# Altium PCB zigo_pcb2.PcbDoc
Units mm, origin at the board's own origin, x right, y up, seen from the top; angles counter-clockwise.
Board outline 87.88 x 73.23 mm, 2 copper layers (Top Layer, Bottom Layer); 42 components, 31 nets, 175 pads, 6 vias.
Unrouted connection lines stored in the file: 3.
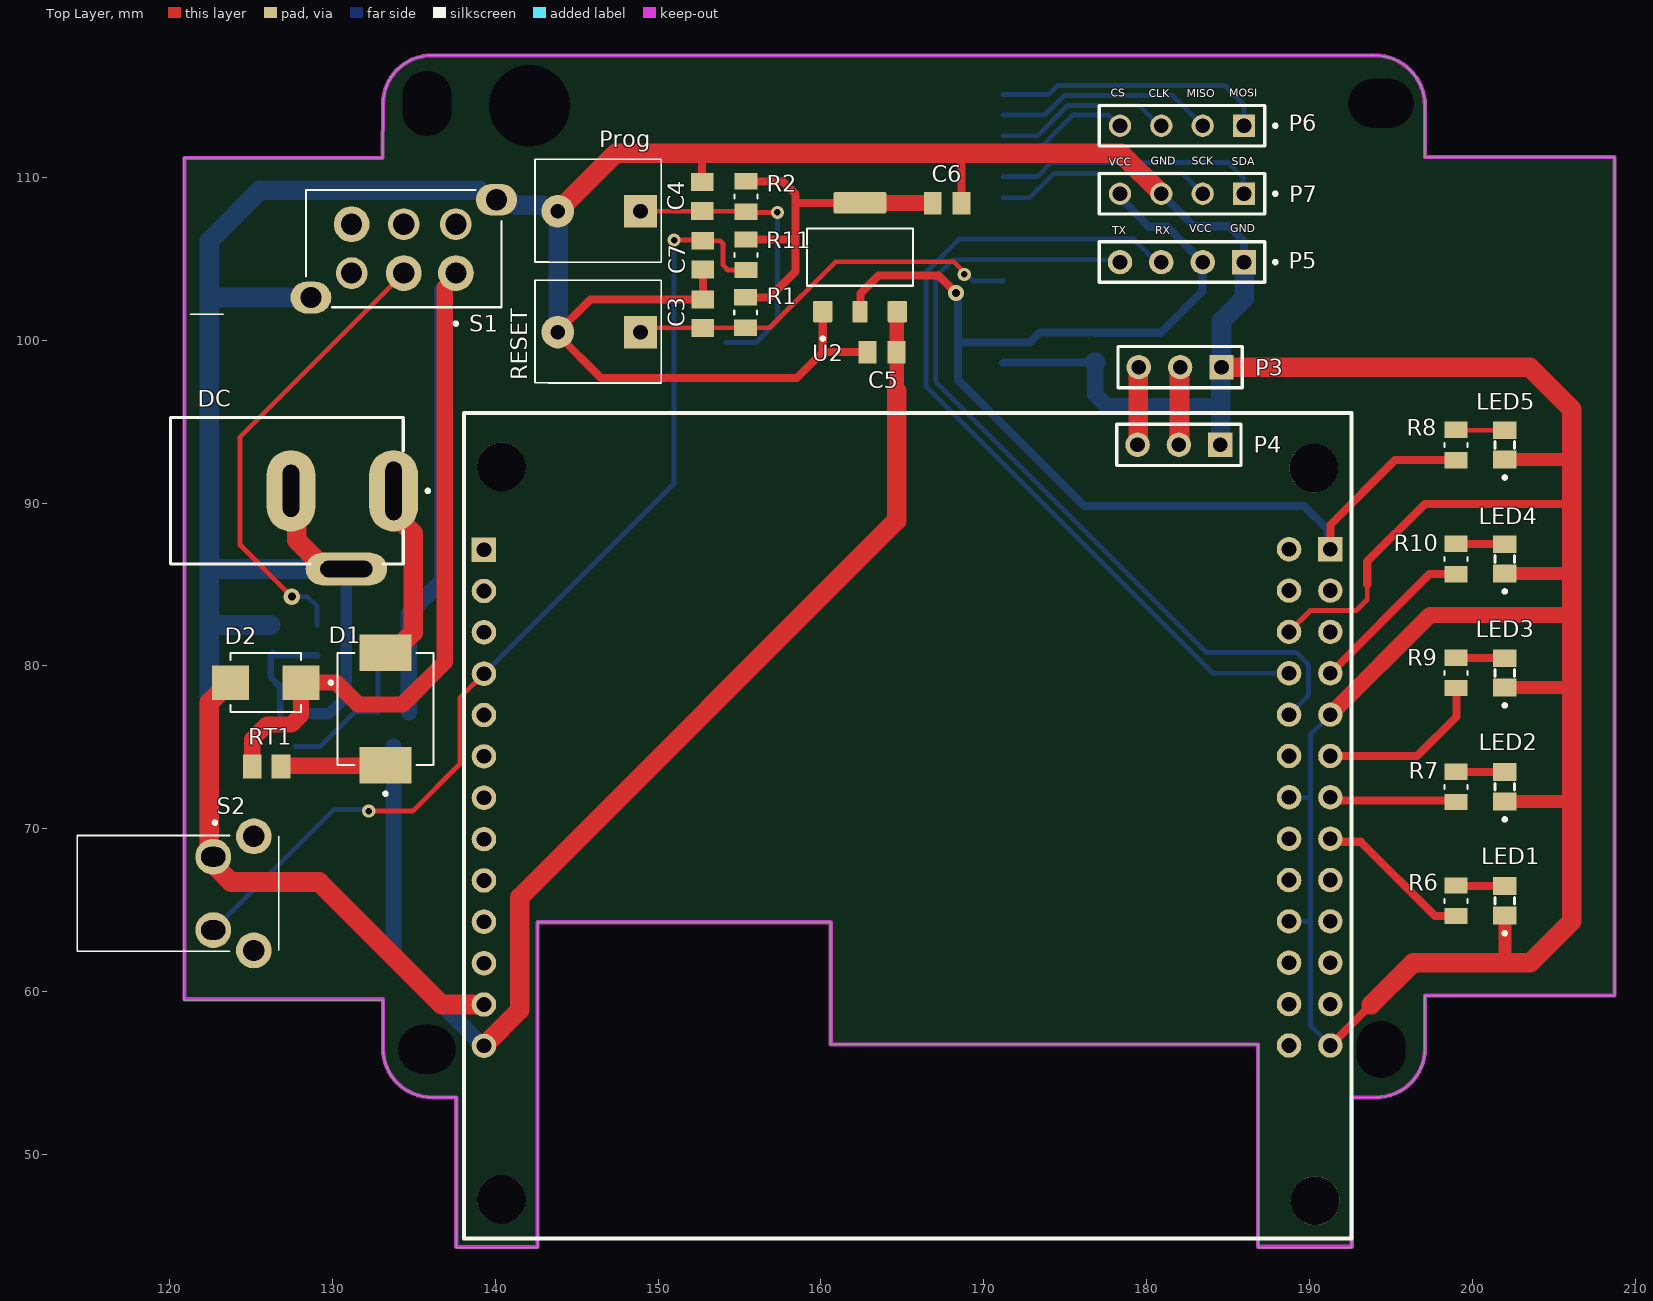
[diagram p0: Top Layer view]
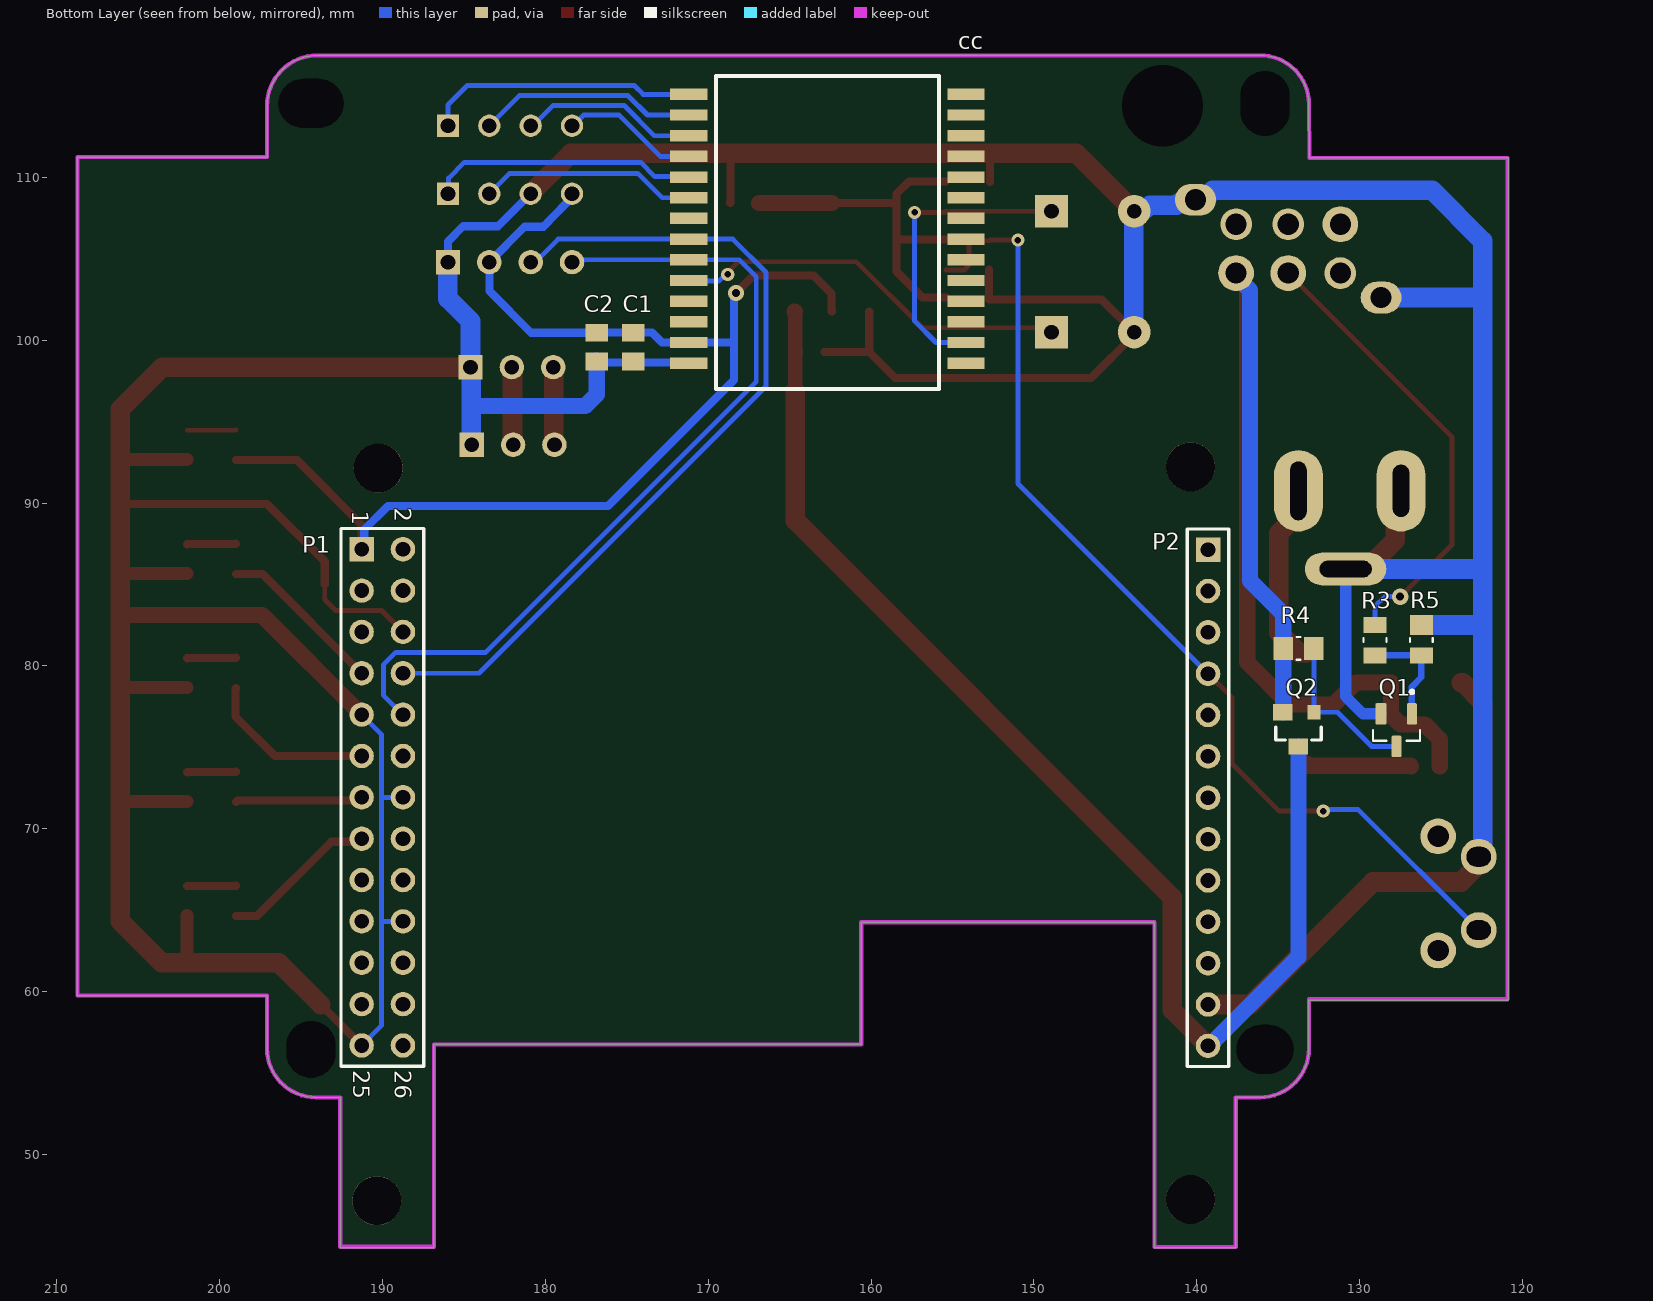
[diagram p1: Bottom Layer view, seen from below]

## Layer stack, top to bottom
Top Solder: solder mask 0.0102, Solder Resist, Dk 3.5
Top Layer: signal copper 0.0356
Dielectric 1: dielectric 0.32, FR-4, Dk 4.8
Bottom Layer: signal copper 0.0356
Bottom Solder: solder mask 0.0102, Solder Resist, Dk 3.5

## Board outline
133.1,56.5 ccw(c136.1,56.5) 136.1,53.5 137.6,53.5 137.6,44.275 142.6,44.275 142.6,64.25 160.6,64.25 160.6,56.75 186.85,56.75 186.85,44.275 192.6,44.275 192.6,53.5 194.1,53.482 194.1,53.5 ccw(c194.1,56.5) 197.1,56.5 197.1,59.75 208.75,59.75 208.75,111.25 197.1,111.25 197.1,114.396 ccw(c193.996,114.396) 193.996,117.5 136.1,117.5 ccw(c136.1,114.5) 133.1,114.5 133.075,111.2 120.875,111.2 120.875,59.45 133.1,59.45
cut-out: 119.6,170.327 119.6,191.9 141.863,191.9 141.863,170.327

## Design rules (kind name [scope] priority, off if disabled: settings)
Clearance Type-C [HasFootprint('VALCON_CSP-USC16-TR')] p1: gap=0.127 ignorepadtopadclearanceinfootprint=FALSE
Clearance [All] p2: gap=0.3 ignorepadtopadclearanceinfootprint=FALSE
PolygonConnect [All] p1: connectstyle=Relief reliefconductorwidth=0.254 reliefentries=4 polygonreliefangle="90 Angle" airgapwidth=0.254
RoutingVias [All] p1: holewidth=0.711 width=1.27 viastyle="Through Hole" minholewidth=0.711 minwidth=1.27 maxholewidth=0.711 maxwidth=1.27
SolderMaskExpansion [All] p1: expansion=0.102 istentingtop=FALSE
Width [All] p1: maxlimit=2 minlimit=0.3 preferedwidth=0.5 minimp=50.000000 maximp=50.000000 favimp=50.000000
Width Width_1 [All] p2: maxlimit=1 minlimit=0.254 preferedwidth=0.5 minimp=50.000000 maximp=50.000000 favimp=50.000000
30 further rules are at their usual default settings.

## Components (designator, comment, footprint, x,y, rotation, side; value= is the part's Value field where it differs from the comment)
C1 "10 uf" CAPC2012X90N 174.6,99.575 r90 bottom
C2 "100 nf" CAPC2012X90N 176.85,99.575 r90 bottom
C3 "100 nf" CAPC2012X90N 152.75,101.625 r270 top
C4 "100 nf" CAPC2012X90N 152.7,108.825 r270 top
C5 "10 uf" CAPC2012X90N 163.75,99.275 r0 top
C6 "10 uf" CAPC2012X90N 167.75,108.425 r180 top
C7 "100 nf" CAPC2012X90N 152.75,105.225 r90 top
cc "RF-BM-2652P2" "PCBCOMPONENT_1 - DUPLICATE" 162.675,112.05 r180 bottom
D1 "SS34" DIOM7959X265N 133.25,77.35 r90 top
D2 "SMBJ5.0A" DIOM4336X265N 125.9,78.975 r180 top
DC "DCJ200-10-A-XX-K_REVA" GCT_DCJ200-10-A-XX-K_REVA 127.2,90.75 r270 top locked
LED1 "597-3305-607F" LEDC2012X70N 202,65.575 r90 top
LED2 "597-3305-607F" LEDC2012X70N 202,72.57 r90 top
LED3 "597-3305-607F" LEDC2012X70N 202,79.57 r90 top
LED4 "597-3305-607F" LEDC2012X70N 202,86.57 r90 top
LED5 "597-3305-607F" LEDC2012X70N 202,93.57 r90 top
P1 "Header 13X2" HDR2X13 191.29,87.165 r270 bottom locked
P2 "Header 13" HDR1X13 139.3,87.14 r270 bottom locked
P3 "Orangepi Serial" HDR1X3 184.6,98.35 r180 top
P4 "Header 3" HDR1X3 184.525,93.575 r180 top locked
P5 "HTSW-104-07-G-S" SAMTEC_HTSW-104-07-G-S#1 182.175,104.8 r0 top
P6 "HTSW-104-07-G-S" SAMTEC_HTSW-104-07-G-S#2 182.175,113.175 r0 top
P7 "HTSW-104-07-G-S" SAMTEC_HTSW-104-07-G-S#2 182.175,109 r0 top
Prog "Push Button" "PUSH BUTTON" 146.375,107.925 r90 top
Q1 "BC817-40" SOT95P240X120-3N 127.725,76.05 r270 bottom
Q2 "AO3401A" SOT23-3 133.75,76.15 r90 bottom
R1 "1K" RESC2012X65N#1 155.375,101.7 r90 top
R2 "1K" RESC2012X65N#1 155.4,108.825 r90 top
R3 "1K" RESC2012X65N#1 129.05,81.575 r90 bottom
R4 "1K" RESC2012X65N#2 133.75,81.075 r180 bottom
R5 "1K" RESC2012X65N#3 126.2,81.575 r90 bottom
R6 "1K" RESC2012X65N#1 199,65.57 r90 top
R7 "1K" RESC2012X65N#1 199,72.57 r90 top
R8 "1K" RESC2012X65N#1 199,93.57 r90 top
R9 "1K" RESC2012X65N#1 199,79.57 r90 top
R10 "1K" RESC2012X65N#1 199,86.57 r90 top
R11 "10k" RESC2012X65N#1 155.4,105.25 r90 top
RESET "Push Button" "PUSH BUTTON" 146.375,100.5 r90 top
RT1 "PRG21BC0R6MM1RA" THRMC2012X110N 125.95,73.825 r180 top
S1 "SPPJ222200" SW_SPPJ222200 134.375,105.625 r180 top
S2 "FSMRA4JH04" FSMRA4JH04 123.92,66.025 r270 top locked
U2 "AMS1117-3.3" SOT229P700X180-4N 162.4,105.1 r90 top

## Footprints (in the part's own frame and the unit in brackets; to place one, negate y for a bottom-side part, rotate by r counter-clockwise, add the part's x,y. Pads: shape width x height; smd on the part's side, far side on the other; paste and mask are expansions set on the pad)
CAPC2012X90N [mm]
  rect 1.1x1.38 smd: 1(-0.885,0) 2(0.885,0)
  body extent -1,-0.63 1,0.63, height 0.9
DIOM4336X265N [mm]
  rect 2.28x2.12 smd: A(2.165,0) C(-2.165,0)
  silkscreen extent -4.1,-1.81 2.16,1.81, body extent -2.67,-1.81 2.67,1.81, height 2.65
DIOM7959X265N [mm]
  rect 2.25x3.18 smd: A(3.455,0) C(-3.455,0)
  silkscreen extent -5.3,-2.95 3.44,2.95, body extent -3.98,-2.95 3.98,2.95, height 2.65
FSMRA4JH04 [mm]
  round 2.2 hole 1.2 slot 1.5 at 90 deg: 1(-2.25,-1.245) 2(2.25,-1.245)
  round 2.2 hole 1.3: 3(3.505,1.245) 4(-3.505,1.245)
  silkscreen extent -4.45,-9.6 3.56,2.76, body extent -4.21,-7 4.21,2.66, height 7.01
GCT_DCJ200-10-A-XX-K_REVA [mm]
  oval 5x3 hole 1 slot 3.6 at 0 deg: 1(0,6.55)
  oval 5x3 hole 1 slot 3.2 at 0 deg: 2(0,0.25)
  oval 2x5 hole 1 slot 3.2 at 90 deg: 3(4.8,3.65)
  silkscreen extent -4.5,-7.15 4.5,8.75, body extent -4.5,-7.15 5.05,7.15, height 11
HDR1X3 [mm]
  rect 1.5x1.5 hole 0.9: 1(0,0)
  round 1.5 hole 0.9: 2(2.54,0) 3(5.08,0)
  silkscreen extent -1.27,-1.27 6.35,1.27
HDR1X13 [mm] "Connector; Header; 13 Position"
  rect 1.5x1.5 hole 0.9: 1(0,0)
  round 1.5 hole 0.9: 2(2.54,0) 3(5.08,0) 4(7.62,0) 5(10.16,0) 6(12.7,0) 7(15.24,0) 8(17.78,0) 9(20.32,0) 10(22.86,0) 11(25.4,0) 12(27.94,0) 13(30.48,0)
  silkscreen extent -1.27,-1.27 31.75,1.27
HDR2X13 [mm] "Connector; Header; 13x2 Position"
  rect 1.5x1.5 hole 0.9: 1(0,0)
  round 1.5 hole 0.9: 2(0,2.54) 3(2.54,0) 4(2.54,2.54) 5(5.08,0) 6(5.08,2.54) 7(7.62,0) 8(7.62,2.54) 9(10.16,0) 10(10.16,2.54) 11(12.7,0) 12(12.7,2.54) 13(15.24,0) 14(15.24,2.54) 15(17.78,0) 16(17.78,2.54) 17(20.32,0) 18(20.32,2.54) 19(22.86,0) 20(22.86,2.54) 21(25.4,0) 22(25.4,2.54) 23(27.94,0) 24(27.94,2.54) 25(30.48,0) 26(30.48,2.54)
  silkscreen extent -1.27,-1.27 31.75,3.81
LEDC2012X70N [mm]
  rect 1.1x1.45 smd: A(0.9,0) C(-0.9,0)
  silkscreen extent -2.1,-0.6 0.2,0.6, body extent -1,-0.63 1,0.63, height 0.7
"PCBCOMPONENT_1 - DUPLICATE" [mm]
  rect 2.3x0.7 smd paste+0 mask+0.102: 1(-8.509,3.053) 2(-8.509,1.783) 3(-8.509,0.513) 4(-8.509,-0.757) 5(-8.509,-2.027) 6(-8.509,-3.297) 7(-8.509,-4.567) 8(-8.509,-5.837) 9(-8.509,-7.107) 10(-8.509,-8.377) 11(-8.509,-9.647) 12(-8.509,-10.917) 13(-8.509,-12.187) 14(-8.509,-13.457) 15(8.509,-13.457) 16(8.509,-12.187) 17(8.509,-10.917) 18(8.509,-9.647) 19(8.509,-8.377) 20(8.509,-7.107) 21(8.509,-5.837) 22(8.509,-4.567) 23(8.509,-3.297) 24(8.509,-2.027) 25(8.509,-0.757) 26(8.509,0.513) 27(8.509,1.783) 28(8.509,3.053)
  silkscreen extent -6.86,-15.04 6.86,4.19
"PUSH BUTTON" [mm]
  rect 2x2 hole 0.9: 1(0,-2.54)
  round 2 hole 0.9: 2(0,2.54)
  silkscreen extent -3.13,-3.81 3.19,3.94
RESC2012X65N#1 [mm]
  rect 1x1.42 smd: 1(-0.935,0) 2(0.935,0)
  silkscreen extent -0.12,-0.7 0.12,0.7, body extent -1,-0.63 1,0.63, height 0.65
RESC2012X65N#2 [mm]
  rect 1.2x1.42 smd: 1(-0.935,0) 2(0.935,0)
  silkscreen extent -0.12,-0.7 0.12,0.7, body extent -1,-0.63 1,0.63, height 0.65
RESC2012X65N#3 [mm]
  rect 1x1.42 smd: 1(-0.935,0)
  rect 1.2x1.42 smd: 2(0.935,0)
  silkscreen extent -0.12,-0.7 0.12,0.7, body extent -1,-0.63 1,0.63, height 0.65
SAMTEC_HTSW-104-07-G-S#1 [mm]
  rect 1.5x1.5 hole 0.9: 01(3.81,0)
  round 1.5 hole 0.9: 02(1.27,0) 03(-1.27,0) 04(-3.81,0)
  silkscreen extent -5.08,-1.24 5.83,1.24
SAMTEC_HTSW-104-07-G-S#2 [mm]
  rect 1.37x1.37 / inner round 1.37 / far side rect 1.37x1.37 hole 0.9: 01(3.81,0)
  round 1.37 hole 0.9: 02(1.27,0) 03(-1.27,0) 04(-3.81,0)
  silkscreen extent -5.08,-1.24 5.83,1.24
SOT23-3 [mm]
  rect 0.9x0.8 smd: 1(1,-0.95)
  rect 1x1.2 smd: 2(1,0.95) 3(-1.1,0)
  silkscreen extent -0.7,-1.4 0.1,1.4, body extent -1.4,-1.45 1.4,1.45, height 1.25
SOT95P240X120-3N [mm]
  rrect25% 1.32x0.6 smd: 1(-1,0.95) 3(1,0)
  rrect25% 1.32x0.7 smd: 2(-1,-0.95)
  silkscreen extent -2.45,-1.45 0.65,1.45, body extent -1.3,-1.53 1.3,1.52, height 1.3
SOT229P700X180-4N [mm]
  rrect15% 1.31x1.2 smd: 1(-3.345,2.29) 3(-3.345,-2.29)
  rrect15% 1.31x0.93 smd: 2(-3.345,0)
  rrect15% 1.31x3.24 smd: 4(3.345,0)
  silkscreen extent -5.1,-3.25 1.75,3.25, body extent -3.25,-3.5 3.25,3.5, height 1.8
SW_SPPJ222200 [mm]
  round 2.2 hole 1.3: 1(-3.2,1.5) 2(0,1.5) 6(3.2,-1.5)
  round 1.95 hole 1.3: 3(3.2,1.5) 4(-3.2,-1.5) 5(0,-1.5)
  oval 2.54x1.95 hole 1.3: S1(-5.7,-3)
  oval 2.5x1.95 hole 1.3: S2(5.7,3)
  silkscreen extent -6,-3.6 6,4.7
THRMC2012X110N [mm]
  rect 1.15x1.47 smd: 1(-0.88,0) 2(0.88,0)

## Part data
C1 C2 C3 C4 C5 C6 C7: library part VJ0805Y104KXXCW1BC, "Capacitor: ceramic; MLCC; 100nF; 25V; X7R; Â±10%; SMD; 0805", Package="0805-2 VISHAY", Check_prices=https://www.snapeda.com/parts/VJ0805Y104KXXCW1BC/Vishay/view-part/?ref=eda, MF="Vishay Vitramon", MP=VJ0805Y104KXXCW1BC, SnapEDA_Link=https://www.snapeda.com/parts/VJ0805Y104KXXCW1BC/Vishay/view-part/?ref=snap
D1: "Diode Schottky 40 V 3A Surface Mount SMC (DO-214AB)", Package="SMC-2 ON Semiconductor", Check_prices=https://www.snapeda.com/parts/SS34/Onsemi/view-part/?ref=eda, MF=onsemi, MP=SS34, SnapEDA_Link=https://www.snapeda.com/parts/SS34/Onsemi/view-part/?ref=snap
D2: "600W, 6.7V, 5%, Unidirectional, TVS", Package="SMD-2 Taiwan Semiconductor", Check_prices=https://www.snapeda.com/parts/SMBJ5.0A/taiwan/view-part/?ref=eda, MF="Taiwan Semiconductor", MP=SMBJ5.0A, SnapEDA_Link=https://www.snapeda.com/parts/SMBJ5.0A/taiwan/view-part/?ref=snap
DC: "Power Barrel Connector Jack 2.05mm ID (0.081), 5.50mm OD (0.217) Through Hole, Right Angle", Package=None, Check_prices=https://www.snapeda.com/parts/DCJ200-10-A-K1-K/Global+Connector+Technology/view-part/?ref=eda, MF="Global Connector Technology", MP=DCJ200-10-A-K1-K, SnapEDA_Link=https://www.snapeda.com/parts/DCJ200-10-A-K1-K/Global+Connector+Technology/view-part/?ref=snap
LED1 LED2 LED3 LED4 LED5: "LED Uni-Color Green 4-Pin Chip 0805 T/R", Package=None, Availability=Unavailable, MP=597-3305-607F, Price=None
P1: "Header, 13-Pin, Dual row", LatestRevisionDate=17-Jul-2002, LatestRevisionNote="Re-released for DXP Platform.", Publisher="Altium Limited"
P2: "Header, 13-Pin", LatestRevisionDate=17-Jul-2002, LatestRevisionNote="Re-released for DXP Platform.", Publisher="Altium Limited"
P3: library part "Header 3", "Header, 3-Pin", LatestRevisionDate=17-Jul-2002, LatestRevisionNote="Re-released for DXP Platform.", Publisher="Altium Limited"
P4: "Header, 3-Pin", LatestRevisionDate=17-Jul-2002, LatestRevisionNote="Re-released for DXP Platform.", Publisher="Altium Limited"
P5 P6 P7 RT1: Package=None, Availability=Unavailable, Price=None
  P5 P6 P7: MP=HTSW-104-07-G-S
  RT1: MP=PRG21BC0R6MM1RA
Q1: "BJT, SOT-23, 45V, 800mA, NPN, 0.31W, 150Â°C", Package="SOT-23 Diotec", Check_prices=https://www.snapeda.com/parts/BC817-40/Diotec/view-part/?ref=eda, MF="Diotec Semiconductor", MP=BC817-40, SnapEDA_Link=https://www.snapeda.com/parts/BC817-40/Diotec/view-part/?ref=snap
Q2: "P-Channel 30 V 4A (Ta) 1.4W (Ta) Surface Mount SOT-23-3", Package="SOT-23 Alpha &amp; Omega Semiconductor", Check_prices=https://www.snapeda.com/parts/AO3401A/Alpha/view-part/?ref=eda, MF="Alpha & Omega Semiconductor", MP=AO3401A, SnapEDA_Link=https://www.snapeda.com/parts/AO3401A/Alpha/view-part/?ref=snap
R1 R2 R3 R4 R5 R6 R7 R8 R9 R10 R11: library part RN73C2A5K11BTD, "RES SMD 5.11KOHM 0.1% 1/10W 0805", Package=0805, Power_Rating=".1 W", Resistance=5.11K, Tolerance=.1%, Check_prices=https://www.snapeda.com/parts/RN73C2A5K11BTD/TE+Connectivity+Passive+Product/view-part/?ref=eda, EU_RoHS_Compliance=Compliant, MF="TE Connectivity", MP=RN73C2A5K11BTD, SnapEDA_Link=https://www.snapeda.com/parts/RN73C2A5K11BTD/TE+Connectivity+Passive+Product/view-part/?ref=snap
S1: "Switch Push Button N.O./N.C. DPDT Plunger 0.2A 30VDC Latching PC Pins Bracket Mount/Through Hole Bulk", Package=None, Availability=Warning, MF=ALPS, Mouser-Purchase-URL=https://snapeda.com/shop?store=Mouser&id=699467, MP=SPPJ222200, Price=None, SnapEDA_Link=https://www.snapeda.com/parts/SPPJ222200/ALPS/view-part/699467/?ref=snap
S2: "Switch, Pushbutton, Tactile, Single Pole, 50mA, Right Angle", Package=None, Availability=Good, Check_prices=https://www.snapeda.com/parts/FSMRA4JH04/TE%20Connectivity/view-part/45679/?ref=eda, MF="TE Connectivity", MP=FSMRA4JH04, Price=None, Purchase-URL=https://pricing.snapeda.com/search/part/FSMRA4JH04/?ref=eda, SnapEDA_Link=https://www.snapeda.com/parts/FSMRA4JH04/TE%20Connectivity/view-part/45679/?ref=snap
U2: "Sot223/Pkg 1-Amp 3.3-Volt Low Drop Out Voltage Regulatator", Package="SOT-223 Seeed Technology", Check_prices=https://www.snapeda.com/parts/AMS1117-3.3/Advanced+Monolithic+Systems/view-part/?ref=eda, MF="Advanced Monolithic Systems", MP=AMS1117-3.3, SnapEDA_Link=https://www.snapeda.com/parts/AMS1117-3.3/Advanced+Monolithic+Systems/view-part/?ref=snap

## Free pads (board coordinates)
  round 0 hole 3 slot 4 at 90 deg: 1(135.8,114.55)
  round 3 hole 3: 1(140.375,47.225) 1(190.35,47.15) 3(140.375,92.225) 4(190.275,92.15)
  round 0 hole 3 slot 3.5 at 90 deg: 1(194.4,56.45)
  round 0 hole 3 slot 4 at 0 deg: 1(194.4,114.55)
  round 0 hole 3 slot 3.5 at 0 deg: 5(135.8,56.45)
  round 0 hole 5: 6(142.1,114.4)

## Via types
v1: diameter 0.8, hole 0.4, Top Layer to Bottom Layer, 4 vias
v2: diameter 1, hole 0.5, Top Layer to Bottom Layer, 2 vias

## Nets (pads, with @x,y where several pads share a name; then routed paths per layer and width w, separated by ;. In a path a pad name is that pad's centre, name@x,y a point inside that pad or via, vN(x,y) a via of type N, cw(c..) or ccw(c..) an arc to the next point about the centre after c; other vN are vias at no path point)
3V3: C1.2 C2.2 C6.2 cc.13 P1.1 P5.02 P7.04 R1.2 R2.2 R8.1 R11.2 U2.2 U2.4 | length 100.4
  Top Layer w0.5: R1.2 156.835,102.635 158.425,104.225 158.425,106.33 ; R11.2 158.28,106.185 158.425,106.33 ; R2.2 157.665,109.76 158.425,109 158.425,108.435 ; U2.2 162.422,101.777 162.422,102.867 163.53,103.975 167.225,103.975 v2(168.3,102.9) ; U2.4@162.41,108.435 158.425,108.435 ; P1.1 191.29,88.665 195.26,92.635 R8.1 ; 158.425,106.33 158.425,108.435
  Top Layer w1: U2.4@162.41,108.435 166.855,108.435 C6.2
  Bottom Layer w0.5: v2(168.3,102.9) 168.425,102.775 168.425,99.775 ; P7.04 178.365,108.765 179.825,107.305 179.825,107.268 180.118,106.975 181.27,106.975 P5.02 183.445,103.02 180.885,100.46 C2.2 176.835,100.475 173.45,100.475 172.838,99.863 cc.13 168.513,99.863 168.425,99.775 ; P1.1 191.128,87.327 191.128,88.372 189.675,89.825 176.15,89.825 168.425,97.55 168.425,99.775
5V: D2.C Q2.2 R4.1 RT1.2 S1.1 | length 70.1
  Top Layer w1: RT1.2 125.07,75.495 125.975,76.4 127.477,76.4 128.062,76.986 128.062,78.973 D2.C 130.225,78.975 131.575,77.625 134.3,77.625 136.9,80.225 136.9,103.218 137.575,103.893 S1.1
  Bottom Layer w1: R4.1@134.68,81.055 134.68,77.15 Q2.2 ; R4.1 134.685,83.185 136.725,85.225 136.725,103.064 137.575,103.914 S1.1
CLK: cc.3 P6.03 | length 11
  Bottom Layer w0.3: cc.3 173.313,112.563 175.175,114.425 179.525,114.425 180.775,113.175 P6.03
CS: cc.4 P6.04 | length 8.5
  Bottom Layer w0.3: cc.4 172.943,111.293 175.475,113.825 177.658,113.825 178.308,113.175 P6.04
GND: C1.1 C2.1 C3.1 C4.1 C5.1 C6.1 C7.1 cc.14 D2.A DC.2 DC.3 LED1.C LED2.C LED3.C LED4.C LED5.C P1.6 P1.9 P1.14 P1.20 P1.25 P2.12 P3.1 P4.1 P5.01 P7.03 Prog.2 Q1.2 R5.2 RESET.2 S1.S1 S1.S2 S2.1 U2.1 | length 404.2
  Top Layer w0.3: P1.6 190.065,83.4 192.875,83.4 193.55,84.075 193.55,85
  Top Layer w0.5: C4.1 152.7,111.475 ; C7.1 C3.1 145.845,102.51 RESET.2 143.835,100.34 146.5,97.675 158.51,97.675 160.11,99.275 ; U2.1 160.11,99.275 ; C5.1 160.11,99.275 ; C6.1@168.648,108.438 C6.1 168.635,111.46 168.65,111.475 ; P1.25 193.8,59.195 ; 193.55,85 193.55,86.4 197.1,89.95 206.125,89.95
  Top Layer w0.8: 202,61.8 LED1.C ; LED2.C 205.97,71.67 ; LED3.C 206.095,78.67 ; LED4.C 205.655,85.67 ; LED5.C 206.12,92.67 206.125,92.675
  Top Layer w1: P1.9 197.41,83.125 206.125,83.125
  Top Layer w1.2: D2.A 123.655,78.975 122.43,77.75 122.43,68.059 123.763,66.725 129.175,66.725 136.7,59.2 P2.12 ; DC.2 127.794,90.406 127.794,87.722 129.566,85.95 DC.3 ; S1.S1 S1.S1@140.573,108.625 ; Prog.2 147.385,111.475 152.7,111.475 168.65,111.475 178.43,111.475 P7.03 ; P4.1 P4.1@184.562,93.612 ; P3.1 203.525,98.35 206.125,95.75 206.125,92.675 206.125,89.95 206.125,83.125 206.125,78.7 ; 193.8,59.195 196.38,61.775 201.975,61.775 ; 202,61.8 201.975,61.775 ; 205.97,71.67 206.125,71.825 ; 206.095,78.67 206.125,78.7 ; 201.975,61.775 203.575,61.775 206.125,64.325 206.125,71.825 ; 206.125,71.825 206.125,78.7
  Bottom Layer w0.3: P1.20 190.075,64.305 ; P1.14 190.075,71.925 ; P1.9@191.005,76.72 190.075,75.79 190.075,71.925 ; P1.25 190.075,57.9 190.075,64.305 ; 190.075,64.305 190.075,71.925
  Bottom Layer w0.5: cc.14 171.233,98.641 C2.1@176.801,98.641 ; P7.03 182.905,107 185.05,107 185.985,106.065 P5.01
  Bottom Layer w0.7: Q1.2 129.775,77.05 130.85,78.125 DC.3
  Bottom Layer w1: C2.1 176.85,96.665 177.553,95.962 184.562,95.962
  Bottom Layer w1.2: S2.1@122.43,68.275 122.43,82.45 ; 123.133,102.625 S1.S2 ; R5.2 122.49,82.51 122.43,82.45 ; DC.3 122.605,85.95 122.43,86.125 ; RESET.2@143.885,101.2 143.86,101.225 143.86,107.9 Prog.2 143.682,108.078 143.116,108.078 142.894,108.3 141.225,108.3 141.044,108.481 140.219,108.481 S1.S1 139.577,108.625 138.999,109.203 125.528,109.203 122.43,106.105 122.43,86.125 ; C2.1@176.801,98.641 C2.1@176.883,98.641 ; P4.1 184.562,93.612 184.562,95.962 184.562,98.312 P3.1 184.6,101.175 185.985,102.56 P5.01 ; 122.43,82.45 122.43,86.125
Input_OP: C5.2 P2.13 Q2.3 U2.3 | length 76.2
  Top Layer w0.9: C5.2 164.663,99.303 164.663,101.728 U2.3 ; 164.65,96.854 C5.2@164.65,99.26
  Top Layer w1: 164.585,96.919 164.65,96.854 ; U2.3 U2.3@164.695,101.75
  Top Layer w1.2: P2.13 141.5,58.86 141.5,65.775 164.65,88.925 164.65,96.854
  Bottom Layer w1: Q2.3 133.75,62.125 P2.13@139.094,56.781
LED1: P1.15 R6.1 | length 9.7
  Top Layer w0.5: P1.15 191.475,69.2 193.15,69.2 197.715,64.635 R6.1
LED2: P1.13 R7.1 | length 7.8
  Top Layer w0.5: P1.13 191.481,71.734 198.901,71.734 R7.1
LED3: P1.11 R9.1 | length 10.5
  Top Layer w0.5: P1.11 196.615,74.465 199.025,76.875 199.025,78.61 R9.1
LED4: P1.7 R10.1 | length 10.2
  Top Layer w0.5: P1.7 197.38,85.635 R10.1
MISO: cc.2 P6.02 | length 13.5
  Bottom Layer w0.3: cc.2 173.733,113.833 174.925,115.025 181.595,115.025 P6.02
MOSI: cc.1 P6.01 | length 16.8
  Bottom Layer w0.3: cc.1 174.003,115.103 174.55,115.65 184.8,115.65 185.985,114.465 P6.01
NetC4_2: C4.2 cc.16 Prog.1 R2.1 | length 18.8
  Top Layer w0.3: Prog.1 152.7,107.925 R2.1@155.433,107.925 ; R2.1 155.44,107.85 v1(157.325,107.85)
  Bottom Layer w0.3: cc.16 156.013,99.863 157.325,101.175 v1(157.325,107.85)
NetD1_C: D1.C RT1.1 | length 6.5
  Top Layer w1: RT1.1 126.865,73.86 133.215,73.86 D1.C D1.C@133.195,73.95
NetLED1_A: LED1.A R6.2 | length 3
  Top Layer w0.5: R6.2 199.015,66.49 201.985,66.49 LED1.A
NetLED2_A: LED2.A R7.2 | length 3
  Top Layer w0.5: R7.2 199.017,73.488 201.982,73.488 LED2.A
NetLED3_A: LED3.A R9.2 | length 3
  Top Layer w0.5: R9.2 199.017,80.488 201.982,80.488 LED3.A
NetLED4_A: LED4.A R10.2 | length 3
  Top Layer w0.5: R10.2 199.017,87.487 201.983,87.487 LED4.A
NetLED5_A: LED5.A R8.2 | length 3
  Top Layer w0.3: R8.2 199.035,94.47 LED5.A
NetQ1_1: Q1.1 R3.1 R5.1 | length 6.9
  Bottom Layer w0.4: R5.1@126.195,80.645 R5.1 ; R5.1@126.358,80.798 R5.1 ; Q1.1 126.775,78.725 126.2,79.3 R5.1 ; R3.1@129.055,80.635 R3.1 R5.1
NetQ1_3: Q1.3 Q2.1 R4.2 | length 10.6
  Bottom Layer w0.3: Q1.3 129.25,75.05 131.35,77.15 Q2.1 R4.2@132.8,81.04 ; R4.2@132.611,80.871 R4.2@132.79,81.05 ; R4.2@132.769,81.071 R4.2@132.79,81.05 ; R4.2@132.775,81.115 R4.2@132.775,81.345 ; R4.2@132.79,81.075 132.8,81.065 R4.2@132.8,81.06 ; R4.2 R4.2@132.8,81.06 ; R4.2@132.825,80.935 132.825,81.015 132.803,81.038 R4.2@132.8,81.04 ; R4.2@132.85,81.115 R4.2@132.89,81.075 ; R4.2@132.79,81.05 R4.2@132.8,81.04 ; R4.2@132.79,81.05 R4.2@132.8,81.06 ; R4.2@132.8,81.04 R4.2@132.8,81.06
NetR3_2: R3.2 S1.2 | length 28.3
  Top Layer w0.3: v2(127.5,84.25) 124.325,87.425 124.325,94.075 S1.2
  Bottom Layer w0.3: v2(127.5,84.25) 128.45,84.25 129.05,83.65 R3.2
RESET: C3.2 cc.10 R1.1 RESET.1 | length 24.6
  Top Layer w0.3: RESET.1 149.18,100.765 R1.1 156.84,100.765 160.9,104.825 168.161,104.825 168.373,104.613 168.8,104.185 v1(168.8,104.05)
  Bottom Layer w0.3: v1(168.8,104.05) 168.935,104.05 169.351,103.634 171.146,103.634 cc.10
RESET_KEY: C7.2 P2.4 R11.1 S2.2 | length 63
  Top Layer w0.3: v1(132.225,71.075) 134.925,71.075 137.825,73.975 137.825,78.045 P2.4 ; v1(150.975,106.15) 152.71,106.15 C7.2 153.799,106.11 153.975,105.934 153.975,104.625 154.285,104.315 R11.1
  Bottom Layer w0.3: S2.2 130.075,71.175 132.125,71.175 v1(132.225,71.075) ; P2.4 150.975,91.195 v1(150.975,106.15)
RX: cc.8 P1.8 P5.03 | length 52.6
  Bottom Layer w0.3: P5.03@180.905,104.525 179.217,106.213 cc.8 168.488,106.213 166.45,104.175 166.45,97.175 184.08,79.545 P1.8
RX_Console: P3.2 P4.2 | length 4.8
  Top Layer w1.2: P4.2 182.022,93.612 182.022,98.312 P3.2
SCK: cc.6 P7.02 | length 13.4
  Bottom Layer w0.3: cc.6 171.187,108.75 172.825,108.75 174.325,110.25 182.195,110.25 P7.02
SDA: cc.5 P7.01 | length 16.5
  Bottom Layer w0.3: cc.5 171.211,110.05 173.275,110.05 174.15,110.925 184.975,110.925 185.941,109.959 185.941,109.044 P7.01
TX: cc.9 P1.10 P5.04 | length 52
  Bottom Layer w0.3: P5.04@178.365,104.525 178.04,104.525 177.623,104.943 cc.9 168.093,104.943 167.05,103.9 167.05,97.45 183.675,80.825 189.185,80.825 189.95,80.06 189.95,78.205 P1.10
TX_Console: P3.3 P4.3 | length 4.8
  Top Layer w1.2: P4.3 179.482,93.612 179.482,98.312 P3.3
VBUS: D1.A DC.1 | length 11.4
  Top Layer w1.2: D1.A 133.715,80.805 134.95,82.04 134.95,88.147 133.75,89.347 DC.1
pads on no net: cc.7 cc.11 cc.12 cc.15 cc.17 cc.18 cc.19 cc.20 cc.21 cc.22 cc.23 cc.24 cc.25 cc.26 cc.27 cc.28 P1.2 P1.3 P1.4 P1.5 P1.12 P1.16 P1.17 P1.18 P1.19 P1.21 P1.22 P1.23 P1.24 P1.26 P2.1 P2.2 P2.3 P2.5 P2.6 P2.7 P2.8 P2.9 P2.10 P2.11 S1.3 S1.4 S1.5 S1.6 S2.3 S2.4

## Keep-outs
Keep-Out Layer:
  lines w0.254: 194.1,53.482 192.6,53.5 192.6,44.325 186.85,44.325 186.85,56.75 160.6,56.75 160.6,64.25 142.6,64.25 142.6,44.3 137.6,44.3 137.6,53.5 136.1,53.5 cw(c136.1,56.5) 133.1,56.5 133.1,59.525 120.91,59.525 120.91,111.2 133.075,111.2 133.1,114.5 cw(c136.1,114.5) 136.1,117.5 139.55,117.5 193.996,117.5 cw(c193.996,114.396) 197.1,114.396 197.1,111.25 208.75,111.25 208.75,59.75 197.1,59.75 197.1,56.5 cw(c194.1,56.5) 194.1,53.5

## Silkscreen, mask and mechanical layers (free items; w line width, h text height)
Top Overlay:
  lines w0.1: 121.25,101.6 123.275,101.6
  lines w0.254: 138.075,44.825 192.575,44.825 192.575,95.525 138.075,95.525 138.075,44.825
  text "CS" at 177.8,114.95 h0.5
  text "MOSI" at 185.075,114.95 h0.5
  text "CLK" at 180.125,114.925 h0.5
  text "MISO" at 182.475,114.925 h0.5
  text "GND" at 180.25,110.775 h0.5
  text "SCK" at 182.775,110.775 h0.5
  text "SDA" at 185.225,110.75 h0.5
  text "VCC" at 177.675,110.725 h0.5
  text "VCC" at 182.625,106.625 h0.5
  text "GND" at 185.125,106.625 h0.5
  text "TX" at 177.9,106.525 h0.5
  text "RX" at 180.525,106.525 h0.5

## Text inside footprints (layer, text, board x,y; h text height)
P1: Bottom Overlay "2" at 189.258,89.705 h1 r90; Bottom Overlay "1" at 191.865,89.54 h1 r90; Bottom Overlay "25" at 191.798,55.161 h1 r90; Bottom Overlay "26" at 189.258,55.161 h1 r90